# Altium PCB PCB1.PcbDoc
Units mm, origin at the board's own origin, x right, y up, seen from the top; angles counter-clockwise.
Board outline 38 x 57 mm, 2 copper layers (Top Layer, Bottom Layer); 34 components, 21 nets, 100 pads, 59 vias.
Unrouted connection lines stored in the file: 25.
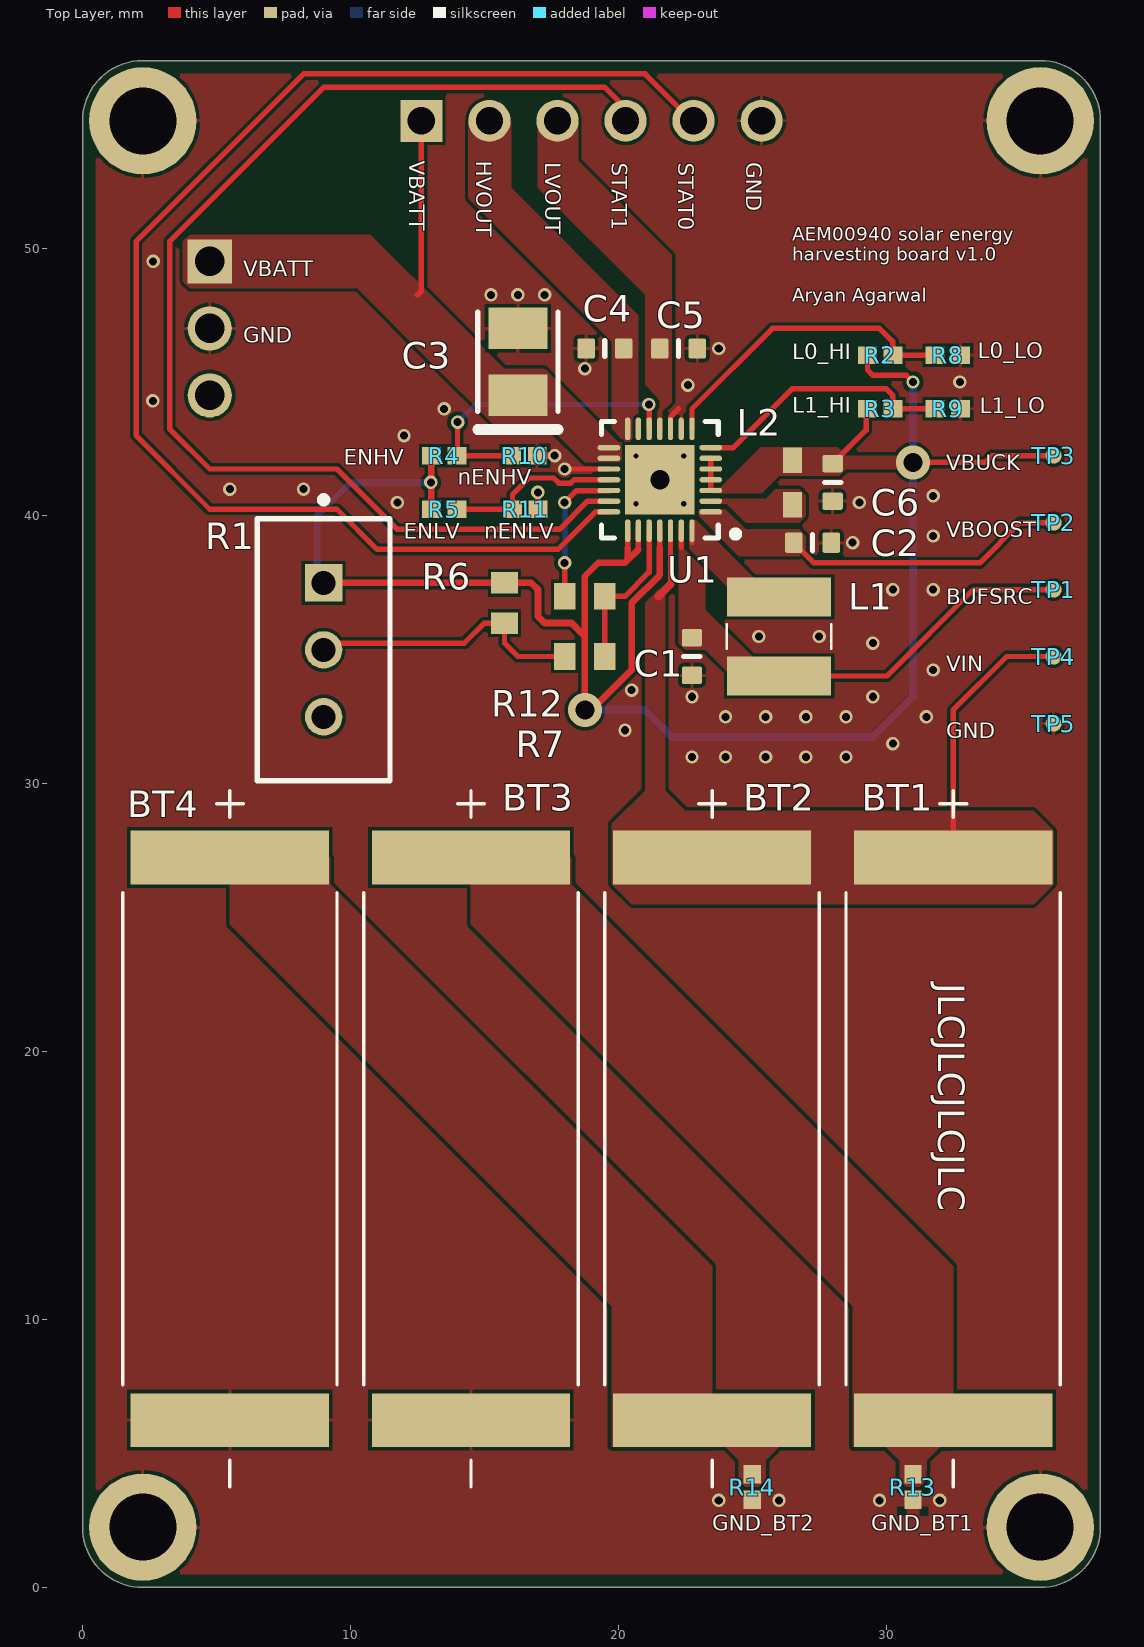
[diagram p0: Top Layer view]
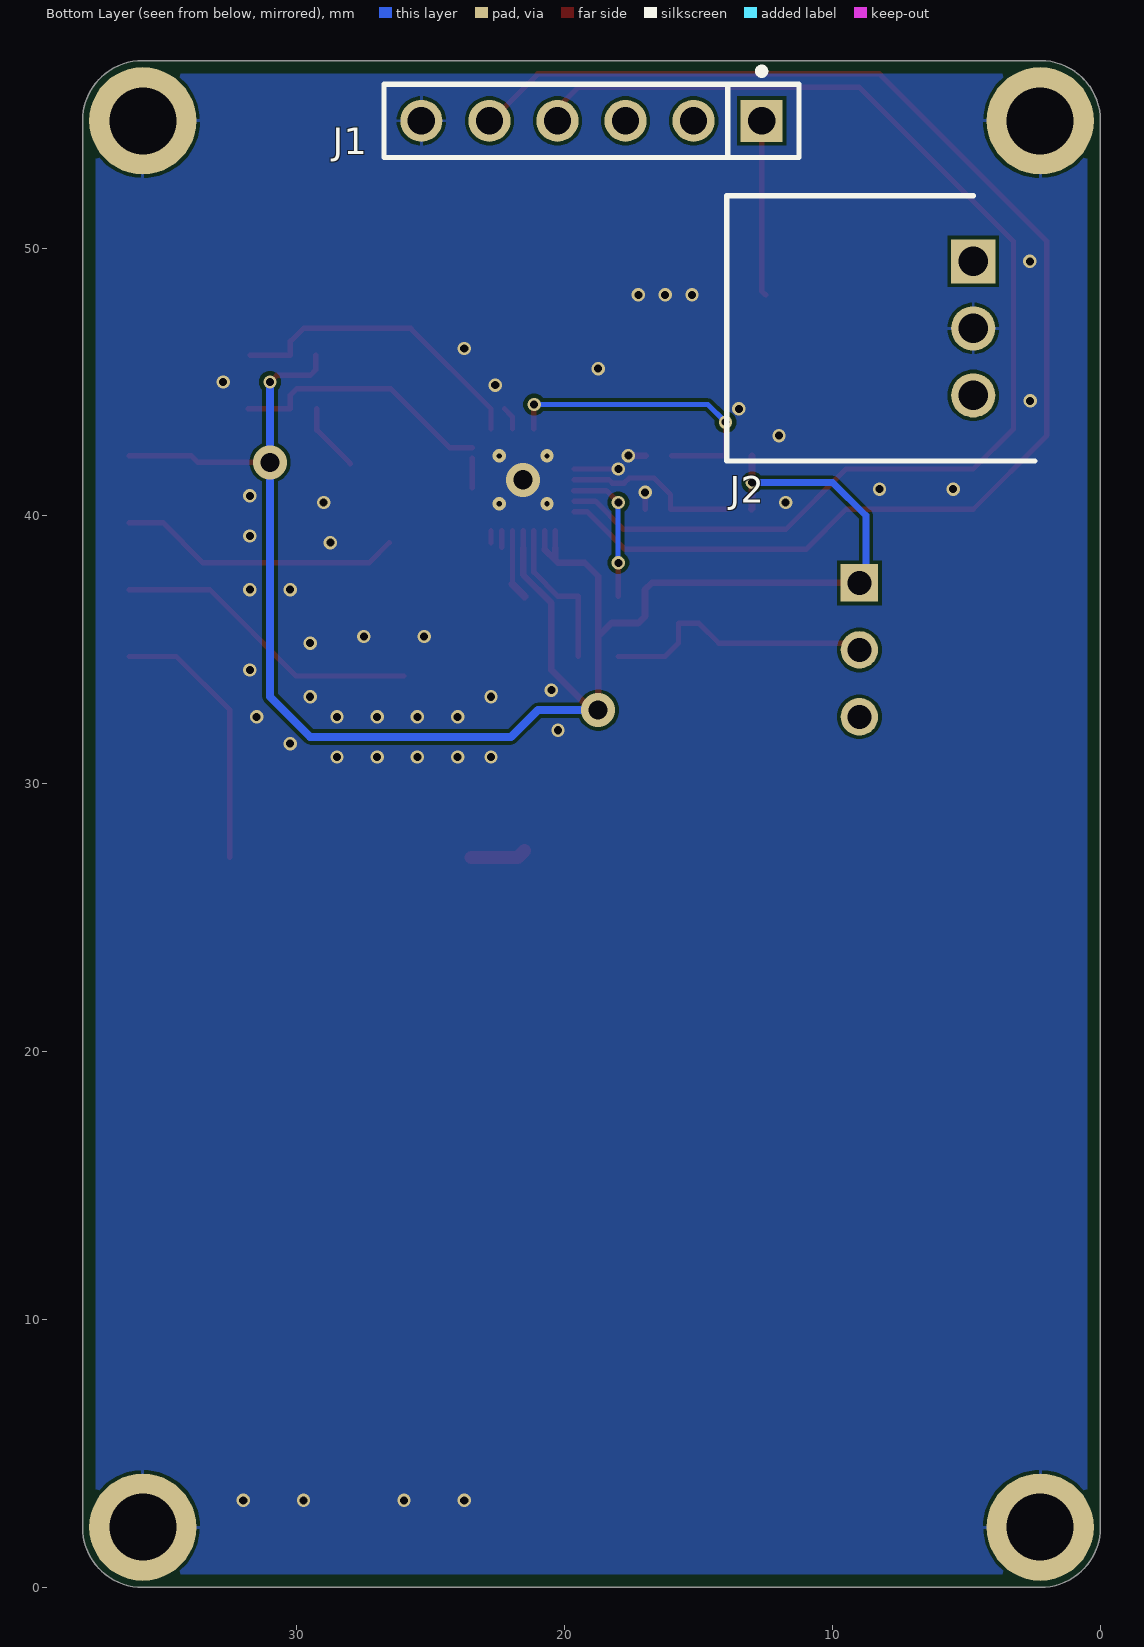
[diagram p1: Bottom Layer view, seen from below]
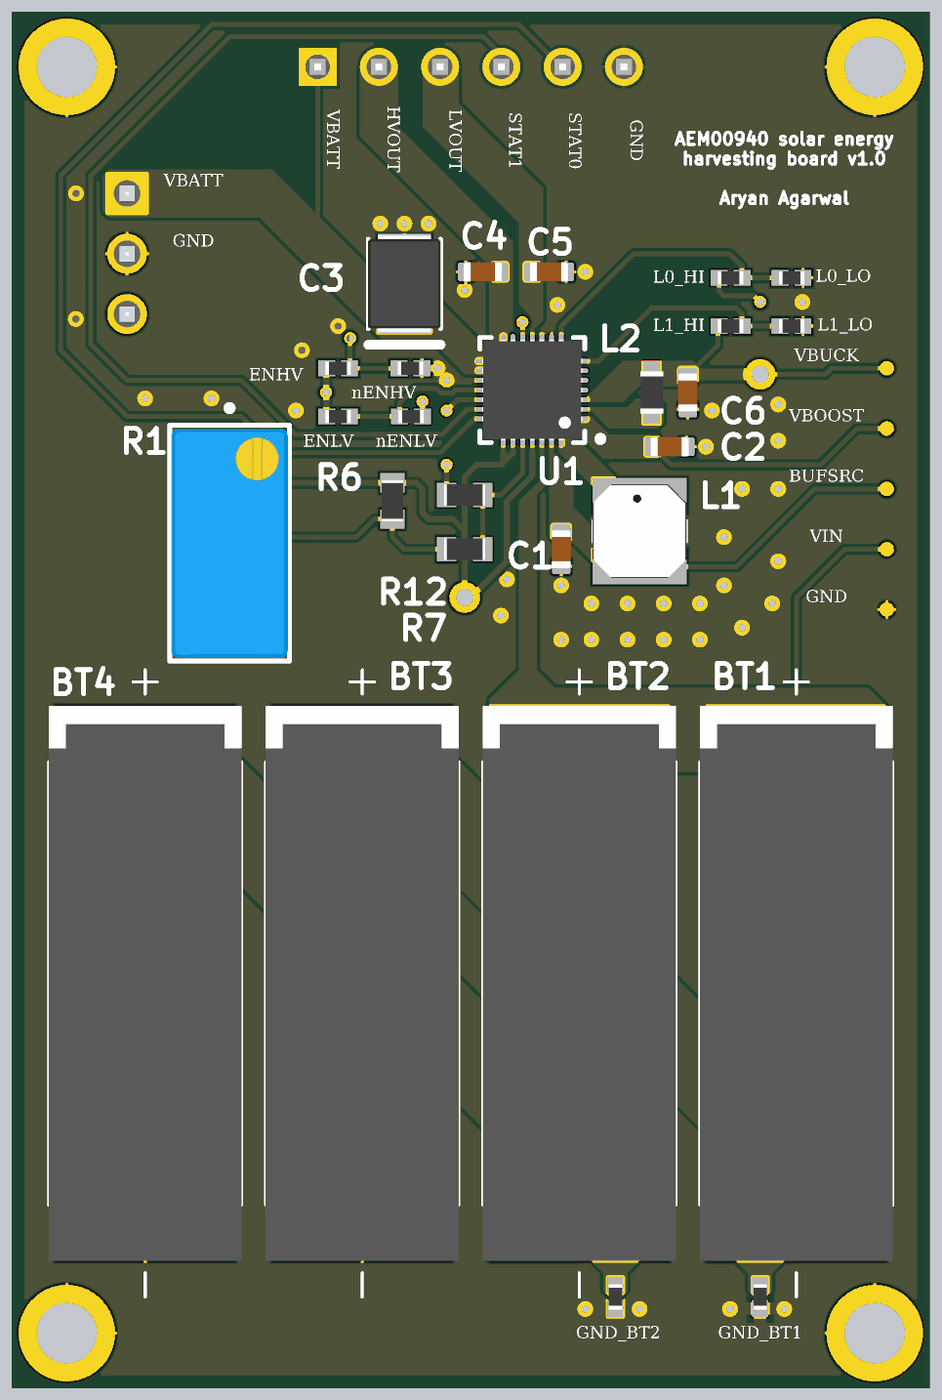
[diagram p2: 3D render of the assembled board from above, using the file's embedded part models]

## Layer stack, top to bottom
Top Solder: solder mask 0.0102, Solder Resist, Dk 3.5
Top Layer: signal copper 0.0356
Dielectric 1: dielectric 0.32, FR-4, Dk 4.8
Bottom Layer: signal copper 0.0356
Bottom Solder: solder mask 0.0102, Solder Resist, Dk 3.5

## Board outline
0,2.25 ccw(c2.25,2.25) 2.25,0 35.75,0 ccw(c35.75,2.25) 38,2.25 38,54.75 ccw(c35.75,54.75) 35.75,57 2.25,57 ccw(c2.25,54.75) 0,54.75

## Design rules (kind name [scope] priority, off if disabled: settings)
BoardOutlineClearance [All] p1: gap=0.2 ignorepadtopadclearanceinfootprint=FALSE
Clearance [All] p1: gap=0.127 ignorepadtopadclearanceinfootprint=FALSE except(0.25: Arc-Hole Track-Hole SMDPad-Hole THPad-Hole Via-Hole Fill-Hole Poly-Hole Region-Hole Text-Hole)
ComponentClearance [All] p1: gap=0.127 collisioncheckmode=3 verticalgap=0.127 showdistances=TRUE
DiffPairsRouting [All] p1: maxlimit=0.254 minlimit=0.127 mostfreqgap=0.127 toplayer_minwidth=0.127 toplayer_maxwidth=25.4 toplayer_prefwidth=0.127 bottomlayer_minwidth=0.127 bottomlayer_maxwidth=25.4 bottomlayer_prefwidth=0.127 maxuncoupledlength=12.7
Height [All] p1: minheight=0 maxheight=1816.048 prefheight=12.7
HoleSize [All] p1: absolutevalues=TRUE maxlimit=6.3 minlimit=0.3 maxpercent=80.000 minpercent=20.000
HoleToHoleClearance [All] p1: gap=0.25 allowstackedmicrovias=FALSE
MinimumAnnularRing [All] p1: minimumring=0.076
MinimumSolderMaskSliver [All] p1: minsoldermaskwidth=0
PlaneClearance [All] p1: clearance=0.127
PlaneConnect PlaneConnectPowerPads [InPadClass('PowerPads')] p1: planeconnectstyle=Direct reliefexpansion=0.508 reliefentries=4 reliefconductorwidth=0.254 reliefairgap=0.254
PlaneConnect [All] p2: pad.planeconnectstyle=Relief pad.reliefexpansion=0.3 pad.reliefentries=4 pad.reliefconductorwidth=0.127 pad.reliefairgap=0.127 via.planeconnectstyle=Direct via.reliefexpansion=0.3 via.reliefentries=4 via.reliefconductorwidth=0.127 via.reliefairgap=0.127
PolygonConnect PolygonConnectPowerPads [All vs (InPadClass('PowerPads'))] p1: connectstyle=Direct reliefconductorwidth=0.254 reliefentries=4 polygonreliefangle="90 Angle" airgapwidth=0.254
PolygonConnect [All] p2: thpad.connectstyle=Relief thpad.reliefconductorwidth=0.127 thpad.reliefentries=4 thpad.polygonreliefangle="90 Angle" thpad.airgapwidth=0.127 smdpad.connectstyle=Relief smdpad.reliefconductorwidth=0.127 smdpad.reliefentries=4 smdpad.polygonreliefangle="90 Angle" smdpad.airgapwidth=0.127 via.connectstyle=Direct via.reliefconductorwidth=0.127 via.reliefentries=4 via.polygonreliefangle="90 Angle" via.airgapwidth=0.127
RoutingVias [All] p1: holewidth=0.3 width=0.6 viastyle="Through Hole" minholewidth=0.3 minwidth=0.6 maxholewidth=0.6 maxwidth=6.6
SilkToSilkClearance [All] p1: silktosilkclearance=0
SilkToSolderMaskClearance [IsPad] p1: minsilkscreentomaskgap=0.127 clearancetoexposedcopper=TRUE
SolderMaskExpansion [All] p1: expansion=0.075 istentingtop=FALSE
SupplyNets "Schematic Supply Nets_5" [InNet('V_IN')] p1: voltage=0.000
SupplyNets "Schematic Supply Nets_4" [InNet('VBUCK')] p2: voltage=0.000
SupplyNets "Schematic Supply Nets_3" [InNet('VBATT')] p3: voltage=0.000
SupplyNets "Schematic Supply Nets_2" [InNet('LVOUT')] p4: voltage=0.000
SupplyNets "Schematic Supply Nets_1" [InNet('HVOUT')] p5: voltage=0.000
SupplyNets "Schematic Supply Nets" [InNet('GND')] p6: voltage=0.000
Width [All] p1: maxlimit=25.4 minlimit=0.127 preferedwidth=0.127 minimp=50.000000 maximp=50.000000 favimp=50.000000
20 further rules are at their usual default settings.

## Components (designator, comment, footprint, x,y, rotation, side; value= is the part's Value field where it differs from the comment)
BT1 "KXOB25-05X3F-TR" SOLAR_KXOB25-14X1F-TR 32.5,16.75 r270 top
BT2 "KXOB25-05X3F-TR" SOLAR_KXOB25-14X1F-TR 23.5,16.75 r270 top
BT3 "KXOB25-05X3F-TR" SOLAR_KXOB25-14X1F-TR 14.5,16.75 r270 top
BT4 "KXOB25-05X3F-TR" SOLAR_KXOB25-14X1F-TR 5.5,16.75 r270 top
C1 "Capacitor 10µF +/-20% 10V 0603" CAPC0603(1608)100_L 22.75,34.75 r270 top value=10µF
C2 "Capacitor 10µF +/-20% 10V 0603" CAPC0603(1608)100_L 27.25,39 r0 top value=22µF
C3 "TAJB106K016RNJ" AVX-TAJ-B-2_L 16.25,45.75 r90 top value=150µF
C4 "Capacitor 10µF +/-20% 10V 0603" CAPC0603(1608)100_L 19.5,46.25 r180 top value=10µF
C5 "Capacitor 10µF +/-20% 10V 0603" CAPC0603(1608)100_L 22.25,46.25 r180 top value=10µF
C6 "Capacitor 10µF +/-20% 10V 0603" CAPC0603(1608)100_L 28,41.25 r90 top value=10µF
J1 "22-28-4063" FP-22-28-4063-MFG 19,54.75 r0 bottom locked
J2 "S3B-XH-A__LF__SN_" SHDRRA3W64P0X250_1X3_990X1150X610P 4.75,49.5 r90 bottom
L1 "22µH" LPS4018223MRC 26,35.5 r270 top
L2 "10µH" MURA-BLM18-F-H1-CHIP-2_V 26.5,41.25 r90 top
R1 "100k POT" FP-PV36W-MFG 9,35 r90 top value=1kΩ
R2 "Resistor 0R 0402 63 mW" RESC1005X40X25ML05T10 29.775,46 r180 top value=0
R3 "Resistor 0R 0402 63 mW" RESC1005X40X25ML05T10 29.775,44 r180 top value=0
R4 "Resistor 0R 0402 63 mW" RESC1005X40X25ML05T10 13.5,42.25 r180 top value=0
R5 "Resistor 0R 0402 63 mW" RESC1005X40X25ML05T10 13.5,40.25 r180 top value=0
R6 "Resistor 0R +/- 5% 0603 100 mW" RESC1608X55X25ML10T15 15.75,36.75 r90 top value=100k
R7 "Resistor 0R +/- 5% 0603 100 mW" RESC1608X55X25ML10T15 18.75,34.75 r180 top value=20k
R8 "Resistor 0R 0402 63 mW" RESC1005X40X25ML05T10 32.3,46 r180 top value=0
R9 "Resistor 0R 0402 63 mW" RESC1005X40X25ML05T10 32.3,44 r180 top value=0
R10 "Resistor 0R 0402 63 mW" RESC1005X40X25ML05T10 16.5,42.25 r180 top value=0
R11 "Resistor 0R 0402 63 mW" RESC1005X40X25ML05T10 16.525,40.25 r180 top value=0
R12 "Resistor 0R +/- 5% 0603 100 mW" RESC1608X55X25ML10T15 18.75,37 r0 top value=390k
R13 "Resistor 0R 0402 63 mW" RESC1005X40X25ML05T10 31,3.75 r270 top value=0
R14 "Resistor 0R 0402 63 mW" RESC1005X40X25ML05T10 25,3.75 r270 top value=0
TP1 "TPAD6R" TP06R 36.25,37.25 r90 top
TP2 "TPAD6R" TP06R 36.25,39.75 r90 top
TP3 "TPAD6R" TP06R 36.25,42.25 r90 top
TP4 "TPAD6R" TP06R 36.25,34.75 r90 top
TP5 "TPAD6R" TP06R 36.25,32.25 r90 top
U1 "AEM00940" QFN40P400X400X85_HS-29N 21.55,41.35 r180 top

## Footprints (in the part's own frame and the unit in brackets; to place one, negate y for a bottom-side part, rotate by r counter-clockwise, add the part's x,y. Pads: shape width x height; smd on the part's side, far side on the other; paste and mask are expansions set on the pad)
AVX-TAJ-B-2_L [mm] "Molded Capacitor, 2-Leads, Body 3.7x3mm, IPC High Density"
  rect 1.55x2.2 smd: 1(-1.25,0) 2(1.25,0)
  silkscreen extent -2.52,-1.5 1.85,1.5, body extent -2.07,-1.5 2.07,1.5, height 2.1
CAPC0603(1608)100_L [mm] "Chip Capacitor, Body 1.6x0.8mm, Height 1.0mm, IPC High Density"
  rrect25% 0.66x0.76 smd: 1(-0.7,0) 2(0.7,0)
  silkscreen extent 0,-0.3 0,0.3, body extent -0.8,-0.4 0.8,0.4, height 0.95
FP-22-28-4063-MFG [mm]
  rect 1.57x1.57 hole 1.02 paste-2539.97 mask+0: 1(-6.35,0)
  round 1.57 hole 1.02 paste-2539.97 mask+0: 2(-3.81,0) 3(-1.27,0) 4(1.27,0) 5(3.81,0) 6(6.35,0)
  silkscreen extent -7.75,-1.97 7.75,1.37, body extent -7.62,-1.25 7.62,1.24, height 8.88
FP-PV36W-MFG [mm]
  rect 1.4x1.4 hole 0.9 paste-2539.97 mask+0: 1(2.5,0)
  round 1.4 hole 0.9 paste-2539.97 mask+0: 2(0,0) 3(-2.5,0)
  silkscreen extent -4.89,-2.48 5.72,2.48, body extent -4.99,-2.58 4.99,2.58, height 0.25
LPS4018223MRC [mm]
  rect 1.45x3.89 smd: 1(-1.475,0) 2(1.475,0)
  silkscreen extent -0.45,-1.95 0.45,1.95, body extent -1.95,-1.95 1.95,1.95, height 1.73
MURA-BLM18-F-H1-CHIP-2_V [mm] "Chip Ferrite Bead, 2-Leads, Body 1.6x0.8mm, Height 0.95mm, Flow"
  rect 0.95x0.7 smd: 1(-0.825,0) 2(0.825,0)
  body extent -0.87,-0.48 0.87,0.48, height 0.95
QFN40P400X400X85_HS-29N [mm] "QFN, 28-Leads, Body 4.00x4.00mm, Pitch 0.40mm, Thermal Pad 2.60x2.60mm, IPC Medium Density"
  oval 0.85x0.2 smd: 1(-1.9,1.2) 2(-1.9,0.8) 3(-1.9,0.4) 4(-1.9,0) 5(-1.9,-0.4) 6(-1.9,-0.8) 7(-1.9,-1.2) 15(1.9,-1.2) 16(1.9,-0.8) 17(1.9,-0.4) 18(1.9,0) 19(1.9,0.4) 20(1.9,0.8) 21(1.9,1.2)
  oval 0.2x0.85 smd: 8(-1.2,-1.9) 9(-0.8,-1.9) 10(-0.4,-1.9) 11(0,-1.9) 12(0.4,-1.9) 13(0.8,-1.9) 14(1.2,-1.9) 22(1.2,1.9) 23(0.8,1.9) 24(0.4,1.9) 25(0,1.9) 26(-0.4,1.9) 27(-0.8,1.9) 28(-1.2,1.9)
  rect 2.6x2.6 smd: 29(0,0)
  silkscreen extent -2.95,-2.18 2.18,2.17, body extent -2.07,-2.07 2.07,2.07, height 0.85
RESC1005X40X25ML05T10 [mm] "Chip Resistor, 2-Leads, Body 1.05x0.55mm, IPC Low Density"
  rect 0.7x0.65 smd: 1(-0.475,0) 2(0.475,0)
  body extent -0.53,-0.28 0.53,0.28, height 0.4
RESC1608X55X25ML10T15 [mm] "Chip Resistor, 2-Leads, Body 1.70x0.90mm, IPC Low Density"
  rect 0.8x1 smd: 1(-0.75,0) 2(0.75,0)
  body extent -0.85,-0.45 0.85,0.45, height 0.55
SHDRRA3W64P0X250_1X3_990X1150X610P [mm]
  rect 1.65x1.65 hole 1.1: 1(0,0)
  round 1.65 hole 1.1: 2(-2.5,0) 3(-5,0)
  silkscreen extent -7.45,-2.3 2.45,9.2, body extent -7.45,-2.3 2.45,9.2, height 6.1
SOLAR_KXOB25-14X1F-TR [mm]
  rect 2x7.4 smd: N(10.5,0) P(-10.5,0)
  silkscreen extent -13,-4 13,4, body extent -11.5,-4 11.5,4, height 1.8
TP06R [mm] "Testpoint, round, d=0.6mm"
  round 0.6 smd paste-1: 1(0,0)

## Part data
BT1 BT2 BT3 BT4: library part KXOB25-14X1F-TR, "Monocrystalline Solar Cell 30.7 mW 690 mV", Package=None, Check_prices=https://www.snapeda.com/parts/KXOB25-14X1F-TR/Sola/view-part/?ref=eda, MF="ANYSOLAR Ltd", MP=KXOB25-14X1F-TR, SnapEDA_Link=https://www.snapeda.com/parts/KXOB25-14X1F-TR/Sola/view-part/?ref=snap
C1 C2 C4 C5 C6: library part CMP-001-00075-4, "Chip Capacitor, 10µF +/-20%, 10V, 0603, Thickness 1 mm", Case/Package=0603, Max Operating Temperature=85°C, Min Operating Temperature=-55°C, Tolerance=10%, Voltage Rating=10V, Mounting Technology=SMT, Pins=2
C3: library part CMP-001-00043-7, "Standard Tantalum, 10 uF, +/- 10%, 16 V, -55 to 125 degC, 1210 (3528 Metric), RoHS, Tape and Reel", Capacitor Type=Tantalum, Case/Package=1210, Manufacturer=AVX, Max Operating Temperature=125°C, Min Operating Temperature=-55°C, Package Description="2-Pin Surface Mount Device, Body 3.5 x 2.85 mm", Package Quantity=2000, Package Reference=TAJ-B-2, Resistance=2.8Ohm, Tolerance=10%, Voltage Rating=16V, Datasheet URL=http://datasheets.avx.com/TAJ.pdf, Datasheet Version=Feb-16, ESR=2.8Ohm, Manufacturer URL=http://www.avx.com/, Mounting Technology=SM, Packaging=TapeandReel, Pins=2, RoHS Compliant=True
J1: library part CMP-04776-000885-1, "CONN HEADER VERT 6POS 2.54MM", Color=Black, Contact Resistance=20mR, Current Rating=4A, Flammability Rating="UL94 V-0", Max Operating Temperature=75°C, Max Voltage Rating (AC)=250V, Max Voltage Rating (DC)=250.25kV, Min Operating Temperature=0°C, Package Quantity=1, Connector Type="Male Pin", Contact Material=Brass, Contact Mating Length=0.24inch, Contact Plating=Gold, Contact Type="Male Pin", Depth=2.49mm, Gender=Male, Glow Wire Compliant=Non-compliant, Housing Color=Black, Housing Material=Thermoplastic, Lead Free="Lead Free", Mount="Through Hole", Number of Circuits=6, Number of Contacts=6, Number of Positions=6, Number of Rows=1, Orientation=Straight, Packaging=Bulk, Pitch=2.54mm, Radiation Hardening=No, RoHS Compliant=Yes, Series="KK® 42375", Termination=Solder, Voltage Rating=250V, Voltage Rating (DC)=250V
J2: "Connector", Manufacturer_Name="JST (JAPAN SOLDERLESS TERMINALS)", Manufacturer_Part_Number="S3B-XH-A (LF)(SN)", Datasheet Link=http://www.farnell.com/datasheets/2057209.pdf, Height=6.1mm
L1: library part LPS4018-223MRC, "Inductor", Manufacturer_Name=COILCRAFT, Mouser Part Number=994-LPS4018-223MRC, Datasheet Link=https://www.coilcraft.com/pdfs/lps4018.pdf, Height=1.8mm, Manufacturer_Part_Number=LPS4018-223MRC, Mouser Price/Stock=https://www.mouser.co.uk/ProductDetail/Coilcraft/LPS4018-223MRC?qs=QQJxVsr8EGZ1iTyTHMP0jg%3D%3D
L2: library part CMP-006-00004-3, "Chip Ferrite Bead for General Use, 120 Ohm, 500 mA, -55 to 125 degC, 0603 (1608 Metric), RoHS, Tape and Reel", Case/Package=0603, Current Rating=500mA, Manufacturer=Murata, Max Operating Temperature=125°C, Min Operating Temperature=-55°C, Package Quantity=4000, Package Reference=BLM18_H950-2, Resistance=200mohm, Tolerance=25%, Core Material=Ferrite, Datasheet URL=https://statics3.seeedstudio.com/images/opl/datasheet/303010016.pdf, Datasheet Version=Jun-12, Impedance=120Ohm, Max Current Rating=500mA, Packaging=TapeandReel, RoHS Compliant=True
R1: library part CMP-07234-000009-1, "TRIMMER 1K OHM 0.5W PC PIN TOP", Manufacturer=Bourns, Manufacturer Part Number=PV36W102C01B00, Package=PV36W, Power Rating=0.5W, Resistance=1kΩ, Temperature="-55°C to +125°C", Temperature Coefficient=100ppm/°C, Temperature Range High=+125°C, Temperature Range Low=-55°C, Tolerance=10%, Automotive=No, Category=Res, ComponentLink2Description=Datasheet, ComponentLink2URL=https://www.bourns.com/docs/Product-Datasheets/pv36.pdf, Composition=Cermet, Device Class L1="Passive Components", Device Class L2=Resistors, Device Class L3="Variable Resistors and Potentiometers", Digikey Description="TRIMMER 1K OHM 0.5W PC PIN TOP", Height=12.05mm, Lead Free=Yes, Mouser Description="Trimmer Resistors - Through Hole 1.0Kohms 10mm Square 25turn", Octopart=https://octopart.com/pv36w102c01b00-bourns-71612321, RoHS=TRUE, Series=PV36, Standoff Height=0.38mm
R2 R3 R4 R5 R8 R9 R10 R11 R13 R14: library part CMP-009-00004-5, "Chip Resistor, 0 Ohm, 0.063 W, -55 to 155 degC, 0402 (1005 Metric)", Case/Package=0402, Max Operating Temperature=155°C, Min Operating Temperature=-55°C, Power=63mW, Voltage Rating=50V, Mounting Technology=SM, Pins=2, RoHS Compliant=True
R6 R7 R12: library part CMP-009-00006-5, "Chip Resistor, 0 Ohm, 0.1 W, -55 to 155 degC, 0603 (1608 Metric)", Case/Package=0603, Max Operating Temperature=155°C, Min Operating Temperature=-55°C, Power=100mW, Tolerance=5%, Voltage Rating=50V, Mounting Technology=SM, Pins=2, RoHS Compliant=True
TP1 TP2 TP3 TP4 TP5: library part CMP-00028-00002-2, "0.6mm round", Pins=1
U1: library part AEM00941

## Free pads (board coordinates)
  round 4 hole 2.5: 1(2.25,2.25) 2(35.75,2.25) 3(2.25,54.75) 4(35.75,54.75)

## Via types
v1: diameter 0.5, hole 0.3, Top Layer to Bottom Layer, 52 vias
v2: diameter 0.5, hole 0.2, Top Layer to Bottom Layer, 4 vias
v3: diameter 1.27, hole 0.711, Top Layer to Bottom Layer, 3 vias

## Nets (pads, with @x,y where several pads share a name; then routed paths per layer and width w, separated by ;. In a path a pad name is that pad's centre, name@x,y a point inside that pad or via, vN(x,y) a via of type N, cw(c..) or ccw(c..) an arc to the next point about the centre after c; other vN are vias at no path point)
ENHV: R4.1 R10.2 U1.12 | length 11.6
  Top Layer w0.2: R4.1 R4.1@14,42.25 ; v1(14,43.5) R4.1@14,42.25 ; R10.2@16,42.25 R4.1@14,42.25 ; v1(21.143,44.161) 21.15,44.154 U1.12
  Bottom Layer w0.2: v1(14,43.5) 14.661,44.161 v1(21.143,44.161)
ENLV: R5.1 R11.2 U1.18 | length 6.6
  Top Layer w0.2: R5.1 R11.2@16,40.25 ; R11.2 16.05,40.8 16.667,41.417 17.585,41.417 17.781,41.221 18.219,41.221 18.348,41.35 U1.18
GND: BT3.N BT4.N C1.2 C2.2 C3.2 C4.2 C5.1 C6.1 J1.6 J2.2 pad.1 pad.2 pad.3 pad.4 R8.1 R9.1 R10.1 R11.1 R13.2 R14.2 TP5.1 U1.9 U1.10 U1.17 U1.29 | length 3.8
  Top Layer w0.2: R11.1 v1(17,40.877) ; v1(18,41.75) U1.17 ; U1.10 21.95,43.7 22.25,44
  Top Layer w0.25: R10.1 v1(17.627,42.25)
  other v1: 23.75,3.25 26,3.25 29.75,3.25 32,3.25 22.75,31 24,31 25.5,31 27,31 28.5,31 30.25,31.5 20.25,32 24,32.5 25.5,32.5 27,32.5 28.5,32.5 31.5,32.5 22.75,33.25 29.5,33.25 20.5,33.5 31.75,34.25 29.5,35.25 25.25,35.5 27.5,35.5 30.25,37.25 31.75,37.25 28.75,39 31.75,39.25 11.75,40.5 29,40.5 31.75,40.75 5.5,41 8.25,41 12,43 13.5,44 2.628,44.294 22.593,44.88 32.75,45 18.75,45.5 23.75,46.25 15.25,48.25 16.25,48.25 17.25,48.25 2.634,49.503
  other v2: 20.661,40.461 22.439,40.461 20.661,42.239 22.439,42.239
  other v3: 21.55,41.35
HVOUT: C4.1 J1.2 U1.14
LVOUT: C5.2 J1.3 U1.11
NetBT1_N: BT1.N BT3.P R13.1
NetBT2_N: BT2.N BT4.P R14.1
NetC1_1: C1.1 L1.2 TP1.1 U1.27 | length 12.2
  Top Layer w0.2: 22.349,38.825 22.35,38.826 U1.27 ; L1.2 30.025,34.025 33.25,37.25 TP1.1
NetC2_1: C2.1 TP2.1 U1.1 | length 10.6
  Top Layer w0.2: C2.1 27.3,38.25 33.5,38.25 35,39.75 TP2.1
NetL1_1: L1.1 U1.28 | length 0.5
  Top Layer w0.2: 22.75,39 U1.28
NetL2_1: L2.1 U1.2
NetR1_2: R1.2 R6.1 R7.2 | length 10.3
  Top Layer w0.2: R1.2@9,35.25 14.25,35.25 15,36 R6.1 15.75,35.25 16.25,34.75 R7.2
SRC_LVL_D: R12.1 U1.19 | length 5.4
  Top Layer w0.2: R12.1 v1(18,38.25) ; v1(18,40.5) 18.444,40.944 U1.19@19.671,40.944
  Bottom Layer w0.2: v1(18,38.25) 18.012,38.262 18.012,40.488 v1(18,40.5)
SRC_LVL_R0: R2.1 R8.2 U1.8 | length 11.7
  Top Layer w0.2: U1.8 22.75,44 25.75,47 29.75,47 30.236,46.514 30.25,46.514 30.25,46.5 R2.1 R8.2@31.75,46
SRC_LVL_R1: R3.1 R9.2 U1.7 | length 9.9
  Top Layer w0.2: U1.7 24.3,42.55 26.5,44.75 29.591,44.75 30,44.75 30.236,44.514 30.25,44.514 30.25,44.5 R3.1 R9.2
SRC_LVL_U: R7.1 R12.2 U1.24 | length 5.8
  Top Layer w0.2: R7.1 R12.2 20.25,37 21.15,37.9 U1.24
STATUS0: J1.5 U1.21 | length 51.3
  Top Layer w0.2: U1.21 19.15,40.15 17.75,38.75 11,38.75 9.5,40.25 4.75,40.25 2,43 2,50.25 8.25,56.5 21,56.5 J1.5@22.75,54.75
STATUS1: J1.4 U1.20 | length 45.6
  Top Layer w0.2: U1.20 18.854,40.55 17.804,39.5 11.75,39.5 9.5,41.75 4.75,41.75 3.25,43.25 3.25,50.25 9,56 19.5,56 20.25,55.25 J1.4@20.25,54.75
V_IN: BT1.P BT2.P TP4.1 U1.26 | length 14.8
  Top Layer w0.2: 21.95,37.45 U1.26 ; BT1.P 32.5,32.75 34.5,34.75 TP4.1
  Top Layer w0.3: 21.5,37 21.95,37.45
  Top Layer w0.5: BT2.P@21.5,27.5 21.75,27.25 BT2.P
VBATT: C3.1 J1.1 J2.1 U1.15 U1.16 | length 6.9
  Top Layer w0.2: 12.5,48.25 12.65,48.4 J1.1@12.65,54.65 ; J1.1@12.5,54.5 J1.1@12.65,54.65 ; J1.1 J1.1@12.65,54.65 ; J1.1@12.75,54.75 J1.1@12.65,54.65
VBUCK: C6.2 L2.2 R1.1 R2.2 R3.2 R4.2 R5.2 R6.2 TP3.1 U1.3 U1.4 U1.5 U1.6 U1.22 U1.23 U1.25 | length 74.2
  Top Layer w0.2: 20.35,38.794 U1.22 ; 20.75,38.75 U1.23 ; 21.55,38.8 U1.25 ; U1.3@23.45,41.05 U1.4 U1.5 U1.6 ; C6.2 29.25,43.2 R3.2@29.25,44 ; R2.2 29.3,45.45 29.5,45.25 30.75,45.25 v1(31,45) ; v3(31,42) 33.693,42 33.943,42.25 TP3.1
  Top Layer w0.25: R1.1@8.75,37.5 R6.2 16.75,37.5 17,37.25 17,36.25 17.25,36 18.25,36 18.75,35.5 ; R4.2@13,42.25 13.013,42.237 13.013,41.263 v1(13,41.25) 13.013,41.237 13.013,40.263 R5.2 ; 20.35,38.794 20.35,38.35 ; 20.75,38.75 20.35,38.35 ; 21.55,38.8 21.55,37.8 20.5,36.75 20.5,34.25 19,32.75 v3(18.75,32.75) 18.75,37.75 19.25,38.25 20.25,38.25 20.35,38.35
  Bottom Layer w0.25: R1.1@8.75,37.75 8.75,40.025 8.775,40.025 10,41.25 v1(13,41.25)
  Bottom Layer w0.3: v3(18.75,32.75) 21,32.75 22,31.75 29.5,31.75 31,33.25 v3(31,42) v1(31,45)
pads on no net: J2.3 R1.3 U1.13

## Polygon pours and split planes (outlines as drawn)
GND on Top Layer "NONET_L-01_P-001" (solid, remove dead copper, pour order 20): 2.25,0.5 cw(c2.25,2.25) 0.5,2.25 0.5,54.75 cw(c2.25,54.75) 2.25,56.5 35.75,56.5 cw(c35.75,54.75) 37.5,54.75 37.5,2.25 cw(c35.75,2.25) 35.75,0.5
VBATT on Top Layer "NONET_L-01_P-001" (solid, pour order 1): 18.75,42.002 18.748,42.002 17.5,43.25 15.75,43.25 15.5,43.25 10.25,48.5 4,48.5 3.75,48.75 3.75,50.25 4,50.5 10.75,50.5 15.75,45.5 17.25,45.5 17.5,45.25 20,42.75 20.25,42.75 20.25,41.996
NetBT2_N on Top Layer "NETBT2_N_L01_P019" (solid, pour order 19): 24.5,4.75 24,5.25 24,6 24.25,6.25 25.5,6.25 26,5.75 26,5.25 25.5,4.75 25.5,4 25.25,3.75 24.75,3.75 24.5,4
NetBT2_N on Top Layer "NETBT2_N_L01_P018" (solid, pour order 18): 5.5,27.25 9.25,27.25 9.25,26.25 23.5,12 23.5,5.25 19.75,5.25 19.75,10.5 5.5,24.75
NetBT1_N on Top Layer "NETBT1_N_L01_P016" (solid, pour order 16): 14.5,27.25 18.25,27.25 18.25,26.25 32.5,12 32.5,5.25 28.75,5.25 28.75,10.5 14.5,24.75
NetBT1_N on Top Layer "NETBT1_N_L01_P011" (solid, pour order 11): 30.5,4 30.75,3.75 31.25,3.75 31.497,3.997 31.506,4.744 32,5.238 32,5.988 30,5.988 30,5.238 30.5,4.738
V_IN on Top Layer "V_IN_L01_P010" (solid, pour order 10): 21,29.75 21,36.75 21.5,37.25 21.75,37.25 21.75,29.75 22.5,29 35.5,29 36.25,28.25 36.25,26.25 35.5,25.5 20.5,25.5 19.75,26.25 19.75,28.5
NetC1_1 on Top Layer "NONET_L-01_P-001" (solid, pour order 2): 22.25,35.25 22.5,35 23.25,35 24.75,33.5 25.5,34.25 23.25,36.5 23.25,37.969 22.446,38.773 22.446,39 22.25,39
LVOUT on Top Layer "NONET_L-01_P-001" (solid, pour order 9): 21.454,43.238 21.462,43.246 21.649,43.246 21.649,43.899 22,44.25 22,49.75 18.5,53.25 18.5,54.75 17,54.75 17,52.25 21,48.25 21,44.892 21.454,44.438
HVOUT on Top Layer "NONET_L-01_P-001" (solid, pour order 8): 20.75,47.5 16,52.25 16,54.75 14.398,54.75 14.398,51.852 19.75,46.5 19.75,43.25 20.25,42.75 20.75,42.75
VBUCK on Top Layer "NONET_L-01_P-001" (solid, pour order 7): 28.5,42.25 31.25,42.25 31.25,41.75 28.5,41.75 28.25,41.5 26,41.5 25.351,40.851 23.451,40.851 23.457,41.053 23.803,41.053 25.315,42.565 28.185,42.565
NetL2_1 on Top Layer "NONET_L-01_P-001" (solid, pour order 6): 25.5,40.641 25.859,41 26.75,41 27,40.75 27,40 26.75,39.75 24.75,39.75 24.041,40.459 23.459,40.459 23.463,40.641 23.891,40.641
NetC2_1 on Top Layer "NONET_L-01_P-001" (solid, pour order 5): 26.75,39.5 27,39.25 27,38.75 26.75,38.5 24.5,38.5 23,40 23,40.25 24,40.25 24.75,39.5
NetL1_1 on Top Layer "NONET_L-01_P-001" (solid, pour order 4): 22.653,38.772 24.425,37 25.75,37 22.906,39.844 22.648,39.844
GND on Bottom Layer "NONET_L-01_P-001" (solid, pour order 0): 2.25,0.5 cw(c2.25,2.25) 0.5,2.25 0.5,54.75 cw(c2.25,54.75) 2.25,56.5 35.75,56.5 cw(c35.75,54.75) 37.5,54.75 37.5,2.25 cw(c35.75,2.25) 35.75,0.5

## Silkscreen, mask and mechanical layers (free items; w line width, h text height)
Top Overlay:
  text "VBATT" at 12,53.25 h1 r270
  text "HVOUT" at 14.5,53.25 h1 r270
  text "LVOUT" at 17.067,53.195 h1 r270
  text "GND" at 24.571,53.205 h1 r270
  text "STAT1" at 19.547,53.188 h1 r270
  text "STAT0" at 22.032,53.183 h1 r270
  text "VBATT" at 6,48.75 h1
  text "AEM00940 solar energy  / harvesting board v1.0 /  / Aryan Agarwal" at 26.5,47.994 h0.51
  text "GND" at 6,46.25 h1
  text "L0_LO" at 33.425,45.686 h1
  text "L0_HI" at 26.5,45.65 h1
  text "L1_HI" at 26.5,43.65 h1
  text "L1_LO" at 33.5,43.626 h1
  text "ENHV" at 9.75,41.7 h1
  text "VBUCK" at 32.25,41.5 h1
  text "nENHV" at 14,40.95 h1
  text "VBOOST" at 32.25,39 h1
  text "ENLV" at 12,38.95 h1
  text "nENLV" at 15,38.95 h1
  text "BUFSRC" at 32.25,36.5 h1
  text "VIN" at 32.25,34 h1
  text "GND" at 32.25,31.5 h1
  text "JLCJLCJLCJLC" at 31.95,22.55 h1 r270
  text "GND_BT2" at 23.5,1.915 h1
  text "GND_BT1" at 29.434,1.915 h1

## Text inside footprints (layer, text, board x,y; h text height)
L2: Mechanical 6 "Land Pattern Adapted for Flow Soldering" at 25.9,40.25 h0.05 r90